# Altium PCB Aux PCB.PcbDoc
Units mil, origin at the board's own origin, x right, y up, seen from the top; angles counter-clockwise.
Board outline 3160 x 1600 mil, 2 copper layers (Top Layer, Bottom Layer), stack 61.2 mil thick; 4 components, 0 nets, 17 pads, 0 vias.
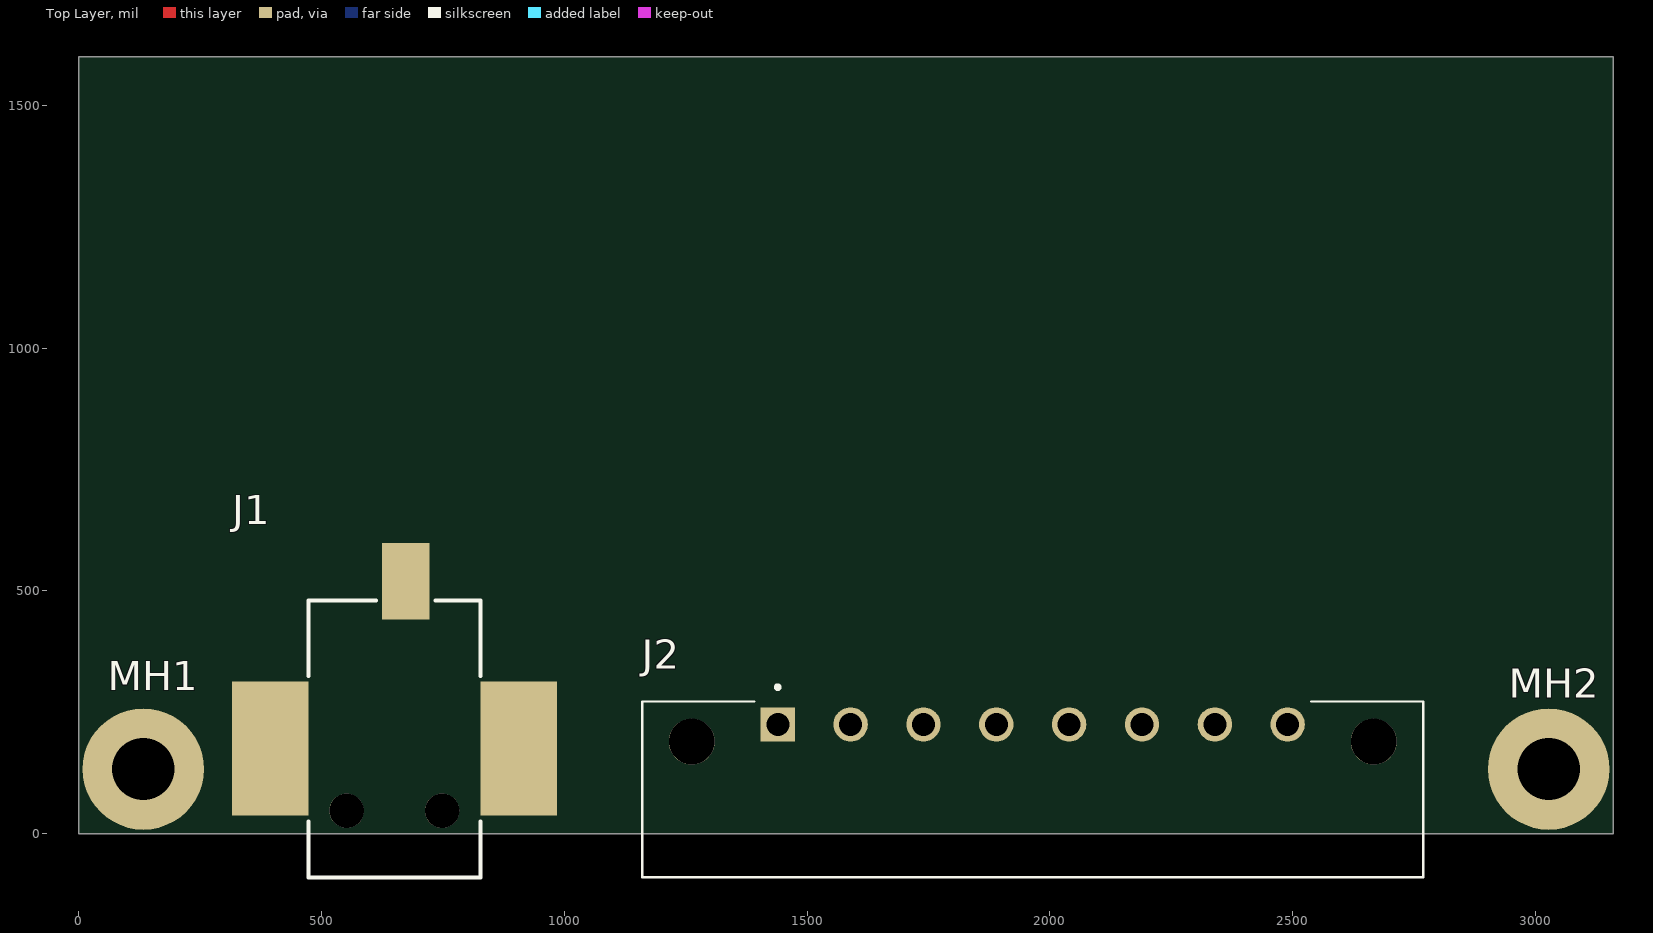
[diagram p0: Top Layer view]
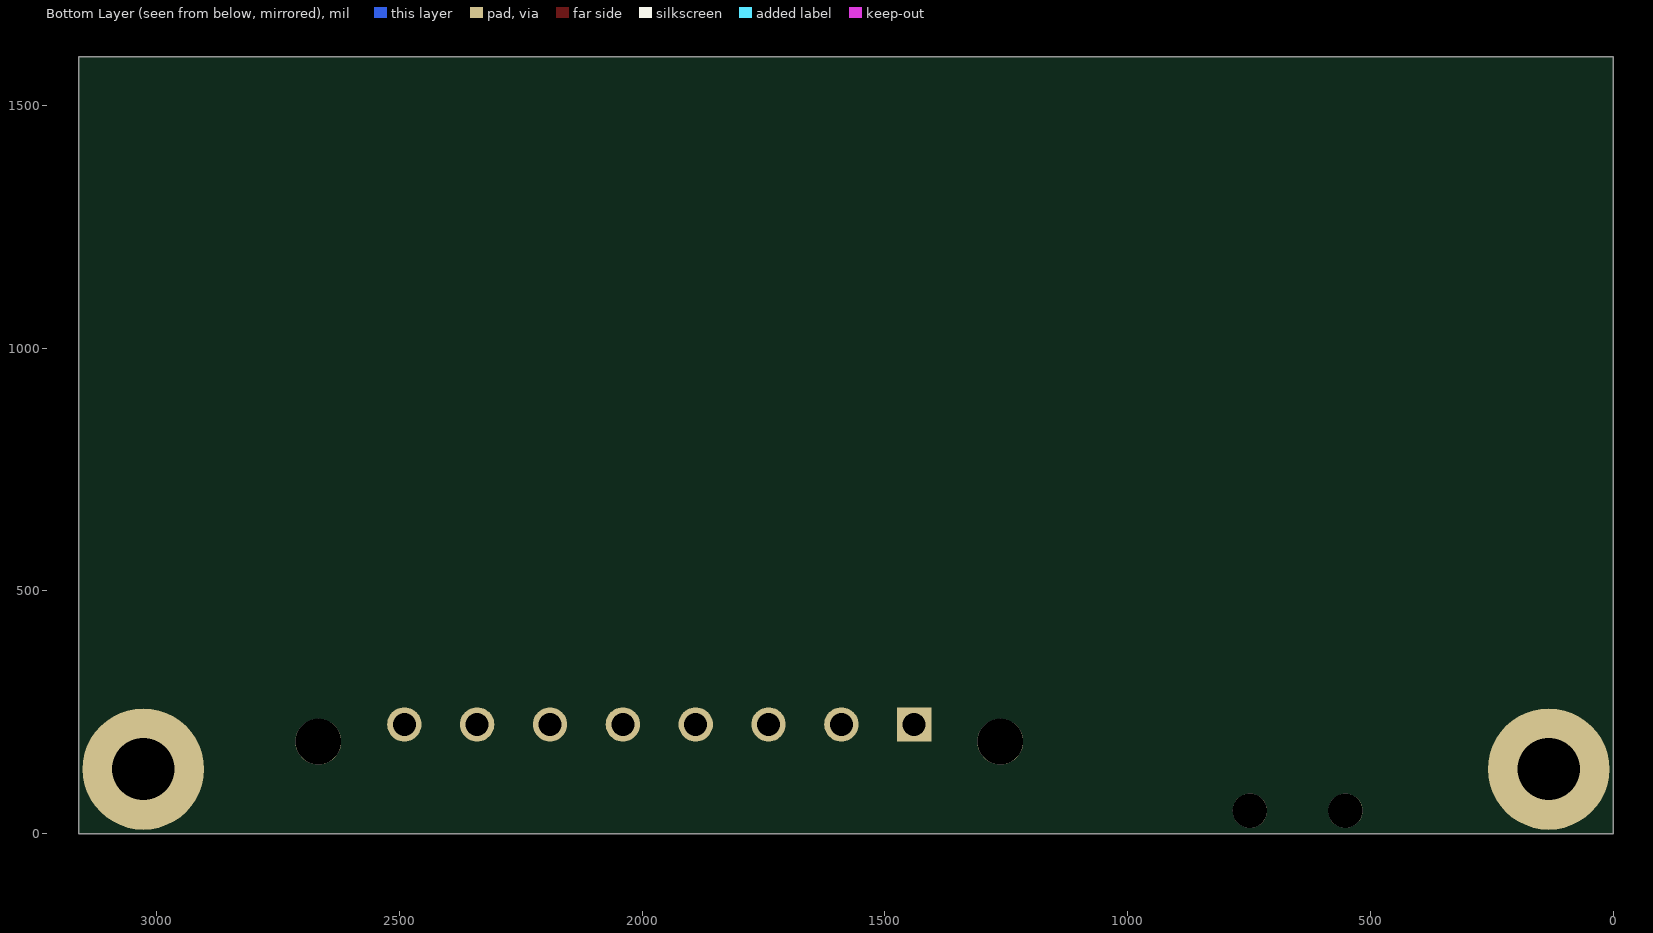
[diagram p1: Bottom Layer view, seen from below]

## Layer stack, top to bottom
Top Solder: solder mask 0.4, Solder Resist, Dk 3.5
Top Layer: signal copper 1.4
Dielectric 1: dielectric 58.4, FR-4, Dk 4.8
Bottom Layer: signal copper 1.4
Bottom Solder: solder mask 0.4, Solder Resist, Dk 3.5

## Board outline
0,0 3160,0 3160,1600 0,1600
board region "Default Layer Stack Region": 0,0 3160,0 3160,1600 0,1600
board region "Default Layer Stack Region": 0,0 3160,0 3160,1600 0,1600

## Design rules (kind name [scope] priority, off if disabled: settings)
Clearance [All] p1: gap=10 ignorepadtopadclearanceinfootprint=FALSE
PolygonConnect [All] p1: connectstyle=Relief reliefconductorwidth=10 reliefentries=4 polygonreliefangle="90 Angle" airgapwidth=10
RoutingVias [All] p1: holewidth=28 width=50 viastyle="Through Hole" minholewidth=28 minwidth=50 maxholewidth=28 maxwidth=50
SolderMaskExpansion [All] p1: expansion=4 istentingtop=FALSE
Width [All] p1: maxlimit=10 minlimit=10 preferedwidth=10
30 further rules are at their usual default settings.

## Components (designator, comment, footprint, x,y, rotation, side; value= is the part's Value field where it differs from the comment)
J1 "694106105102" 694106105102 650,195 r0 top
J2 "1827923" PHOENIX_1827923 1160,-90 r0 top
MH1 "HOLE_128" HOLE_128#1 133,133 r0 top
MH2 "HOLE_128" HOLE_128#2 3050,175 r0 top

## Footprints (in the part's own frame and the unit in brackets; to place one, negate y for a bottom-side part, rotate by r counter-clockwise, add the part's x,y. Pads: shape width x height; smd on the part's side, far side on the other; paste and mask are expansions set on the pad)
694106105102 [mm] "DC Power Jack Right Angled SMT ?6.4 with pegs"
  rect 2.5x4 smd: 1(0.6,8.25)
  rect 4x7 smd: 2(-6.5,-0.5) 3(6.5,-0.5)
  round 1.8 hole 1.8 unplated: MH1(-2.5,-3.75) MH2(2.5,-3.75)
  silkscreen extent -4.5,-7.25 4.5,7.25, body extent -7.6,-7.25 7.6,9.75, height 11.05
HOLE_128#1 [mil]
  round 250 hole 128: 1(0,0)
HOLE_128#2 [mil]
  round 250 hole 128: 1(-23,-42)
PHOENIX_1827923 [mm]
  rect 1.8x1.8 / inner round 1.8 / far side rect 1.8x1.8 hole 1.2: 1(7.1,8)
  round 1.8 hole 1.2: 2(10.91,8) 3(14.72,8) 4(18.53,8) 5(22.34,8) 6(26.15,8) 7(29.96,8) 8(33.77,8)
  round 2.4 hole 2.4 unplated: ""(2.6,7.1) ""(38.27,7.1)
  silkscreen extent 0,0 40.87,10.05, body extent 0.01,0 40.88,9.2, height 7.25

## Part data
J1: library part CMP-1502-00176-2, Color=Black, Current Rating=5A, Flammability Rating="UL94 V-0", Insulation Resistance=100MΩ, Max Operating Temperature=85°C, Min Operating Temperature=-40°C, Operating Supply Voltage=24V, Connector Type=Power, Contact Gender=Female, Contact Material=Gold, Contact Plating=Tin, Gender=Male, Height=11.2mm, Housing Material=Polyamide, Mount="Surface Mount", NexarPartId=52645183, Number Of Contacts=3, Packaging="Tape and Reel", REACH SVHC=Unknown, RoHS=Compliant, Shielding=Unshielded, Termination=SMD/SMT, Voltage Rating=24V, Voltage Rating (DC)=24V
J2: "Pluggable Header 3.81mm 16AWG 160V 8A 8 Position COMBICON MC Series", Package=None, Check_prices=https://www.snapeda.com/parts/1827923/Phoenix+Contact/view-part/?ref=eda, MF="Phoenix Contact", MP=1827923, SnapEDA_Link=https://www.snapeda.com/parts/1827923/Phoenix+Contact/view-part/?ref=snap
MH1 MH2: "0.128 mounting hole, clearance for 4-40"

## Nets (pads, with @x,y where several pads share a name; then routed paths per layer and width w, separated by ;. In a path a pad name is that pad's centre, name@x,y a point inside that pad or via, vN(x,y) a via of type N, cw(c..) or ccw(c..) an arc to the next point about the centre after c; other vN are vias at no path point)
pads on no net: J1.1 J1.2 J1.3 J1.MH1 J1.MH2 J2. J2.1 J2.2 J2.3 J2.4 J2.5 J2.6 J2.7 J2.8 MH1.1 MH2.1